# EAGLE board 16 ch sample-and-hold card (EAGLE 7.2.0)
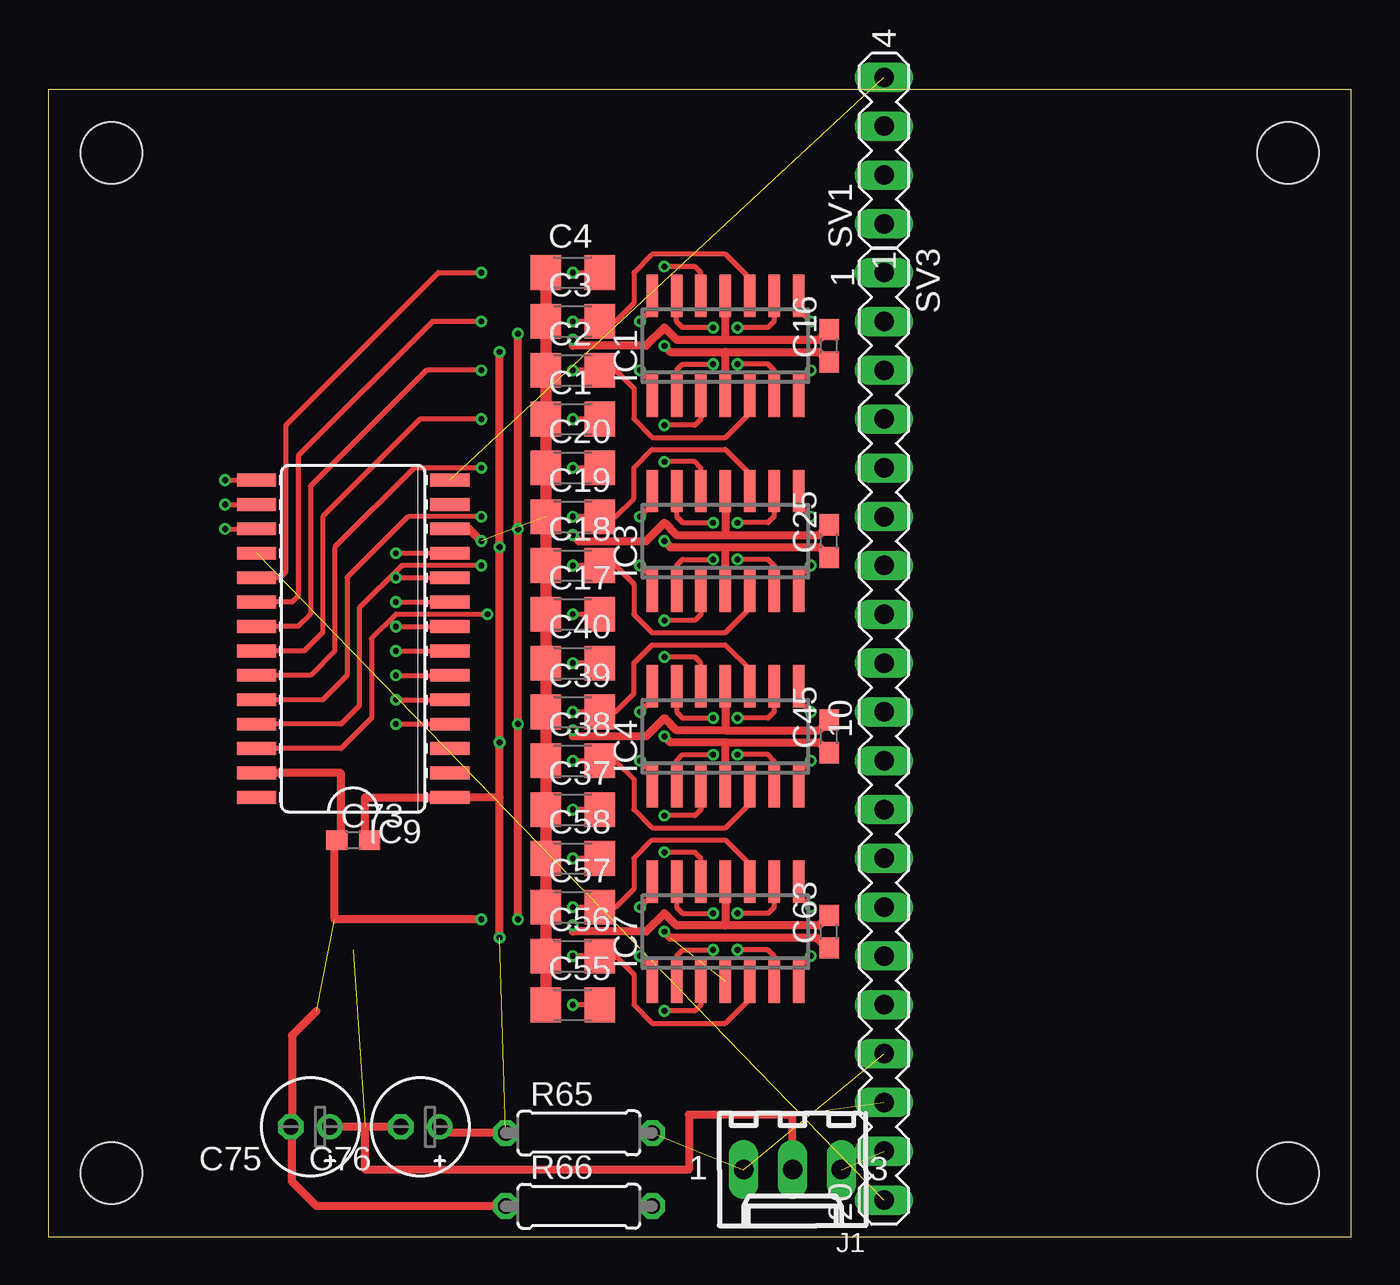
[diagram p0: board, top side]
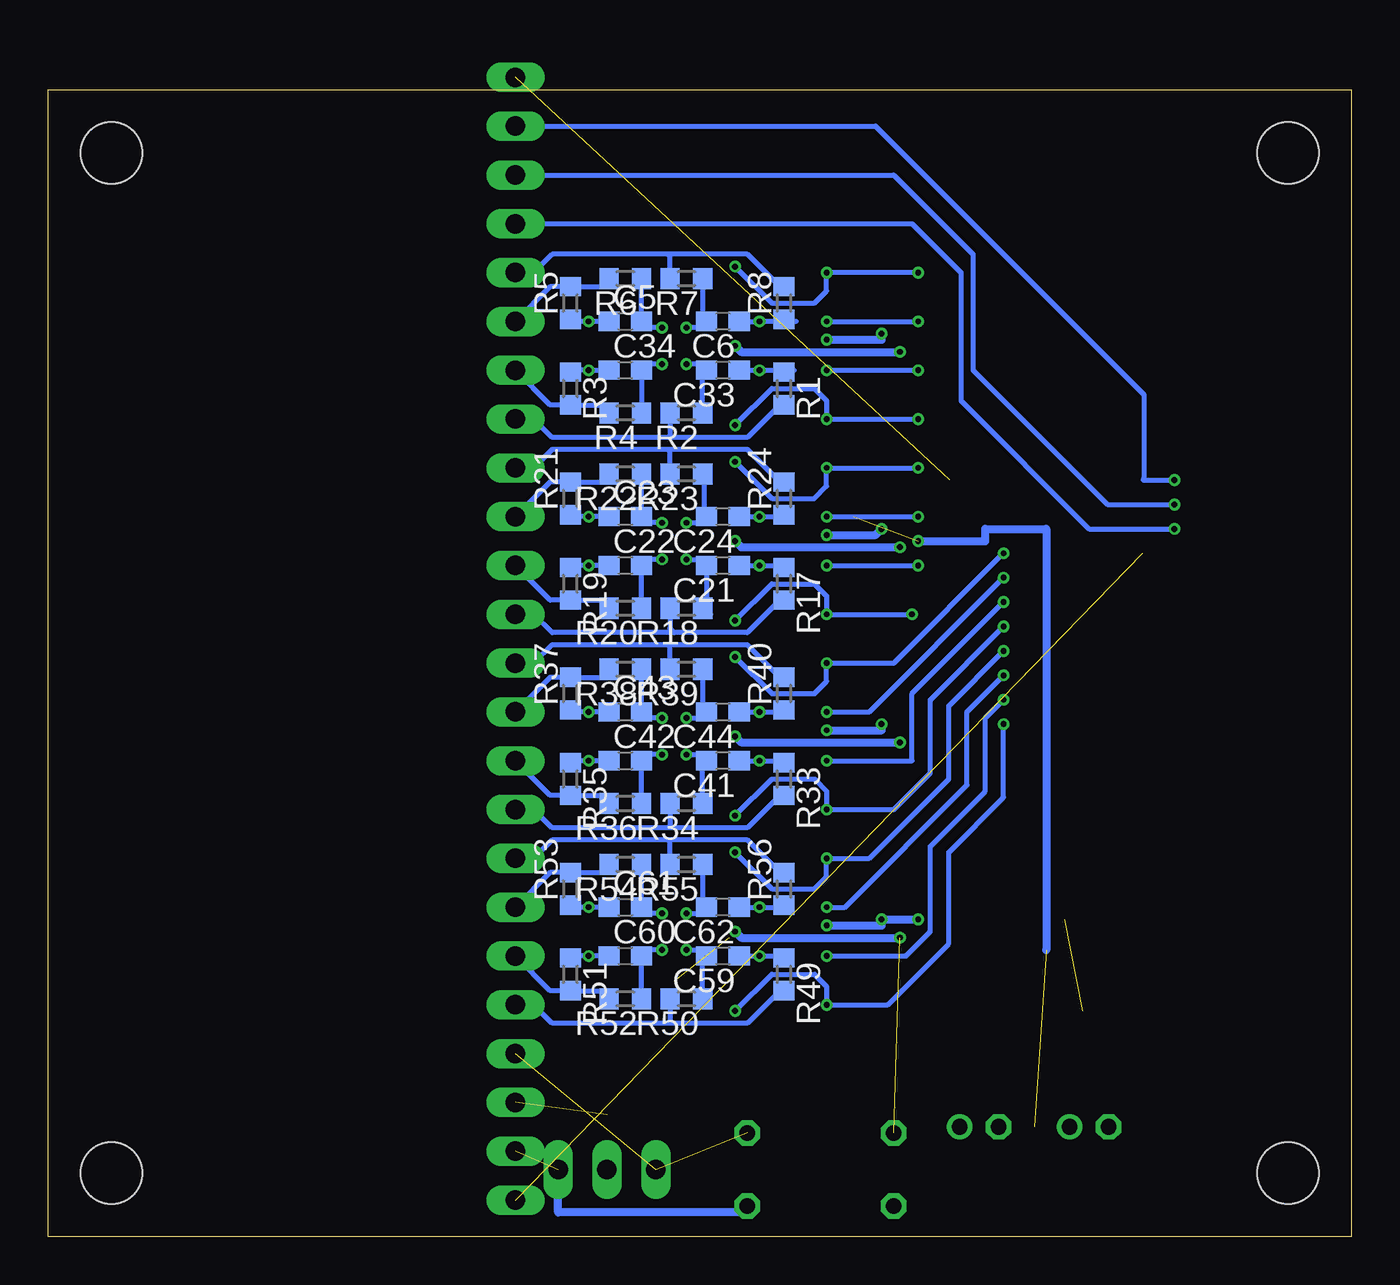
[diagram p1: board, bottom side, seen from below]

Size 67.82 x 59.69 mm. Coordinates in mm from the lower left corner, seen from the top.
Outline: 0,0 67.82,0 67.82,59.69 0,59.69 0,0
Copper layers (1*16): Top 0.035mm / dielectric 1.5mm / Bottom 0.035mm
Design rules "dirt_cheap_dirty_boards.v1": minimum track width 5mil, minimum drill 12mil, track to track 5mil, track to pad 5mil, pad to pad 5mil, via to via 5mil, smd to smd 0mil, copper to edge 10mil, drill to drill 10mil, minimum pad ring 10mil, minimum via ring 6mil, stop-mask expansion 2mil, vias tented up to drill 25mil, thermal gap 10mil
Holes 3.2 mm at 3.3,56.39 64.52,56.39 64.52,3.3 3.3,3.3

## Footprints (pad centres in the part's own frame; a part is rotated, then mirrored left to right if it is on the bottom)
C1206 = smd 1.6 x 1.8: 1 -1.4,0; 2 1.4,0
C0603 = smd 1.1 x 1: 1 -0.85,0; 2 0.85,0
E2-5 = drill 0.813 pad 1.27: + -1.016,0 | drill 0.813 pad 1.27 octagon: - 1.016,0
SO14 = smd 0.6 x 2.2: 1 -3.81,-2.6; 2 -2.54,-2.6; 3 -1.27,-2.6; 4 0,-2.6; 5 1.27,-2.6; 6 2.54,-2.6; 7 3.81,-2.6; 8 3.81,2.6; 9 2.54,2.6; 10 1.27,2.6; 11 0,2.6; 12 -1.27,2.6; 13 -2.54,2.6; 14 -3.81,2.6
SO28L = smd 0.66 x 2.032: 1 -8.255,-5.029; 2 -6.985,-5.029; 3 -5.715,-5.029; 4 -4.445,-5.029; 5 -3.175,-5.029; 6 -1.905,-5.029; 7 -0.635,-5.029; 8 0.635,-5.029; 9 1.905,-5.029; 10 3.175,-5.029; 11 4.445,-5.029; 12 5.715,-5.029; 13 6.985,-5.029; 14 8.255,-5.029; 15 8.255,5.029; 16 6.985,5.029; 17 5.715,5.029; 18 4.445,5.029; 19 3.175,5.029; 20 1.905,5.029; 21 0.635,5.029; 22 -0.635,5.029; 23 -1.905,5.029; 24 -3.175,5.029; 25 -4.445,5.029; 26 -5.715,5.029; 27 -6.985,5.029; 28 -8.255,5.029
6410-03 = drill 1.016 long: 1 2.54,0; 2 0,0; 3 -2.54,0
R0603 = smd 1 x 1.1: 1 -0.85,0; 2 0.85,0
0207/7 = drill 0.813 octagon: 1 -3.81,0; 2 3.81,0
MA04-1 = drill 1.016 long: 1 -3.81,0; 2 -1.27,0; 3 1.27,0; 4 3.81,0
MA20-1 = drill 1.016 long: 1 -24.13,0; 2 -21.59,0; 3 -19.05,0; 4 -16.51,0; 5 -13.97,0; 6 -11.43,0; 7 -8.89,0; 8 -6.35,0; 9 -3.81,0; 10 -1.27,0; 11 1.27,0; 12 3.81,0; 13 6.35,0; 14 8.89,0; 15 11.43,0; 16 13.97,0; 17 16.51,0; 18 19.05,0; 19 21.59,0; 20 24.13,0

## Placement (x,y rotation side)
C1  [C1206]  27.3,42.55 0 top
C2  [C1206]  27.3,45.09 0 top
C3  [C1206]  27.3,47.62 0 top
C4  [C1206]  27.3,50.16 0 top
C5  0.1uF  [C0603]  37.78,47.62 0 bottom
C6  0.1uF  [C0603]  32.7,47.62 180 bottom
C16  0.1uF  [C0603]  40.64,46.35 90 top
C17  [C1206]  27.3,32.38 0 top
C18  [C1206]  27.3,34.92 0 top
C19  [C1206]  27.3,37.47 0 top
C20  [C1206]  27.3,40.01 0 top
C21  0.1uF  [C0603]  32.7,34.92 180 bottom
C22  0.1uF  [C0603]  37.78,34.92 0 bottom
C23  0.1uF  [C0603]  37.78,37.47 0 bottom
C24  0.1uF  [C0603]  32.7,37.47 180 bottom
C25  0.1uF  [C0603]  40.64,36.2 90 top
C33  0.1uF  [C0603]  32.7,45.09 180 bottom
C34  0.1uF  [C0603]  37.78,45.09 0 bottom
C37  [C1206]  27.3,22.23 0 top
C38  [C1206]  27.3,24.77 0 top
C39  [C1206]  27.3,27.3 0 top
C40  [C1206]  27.3,29.84 0 top
C41  0.1uF  [C0603]  32.7,24.77 180 bottom
C42  0.1uF  [C0603]  37.78,24.77 0 bottom
C43  0.1uF  [C0603]  37.78,27.3 0 bottom
C44  0.1uF  [C0603]  32.7,27.3 180 bottom
C45  0.1uF  [C0603]  40.64,26.04 90 top
C55  [C1206]  27.3,12.06 0 top
C56  [C1206]  27.3,14.61 0 top
C57  [C1206]  27.3,17.14 0 top
C58  [C1206]  27.3,19.68 0 top
C59  0.1uF  [C0603]  32.7,14.61 180 bottom
C60  0.1uF  [C0603]  37.78,14.61 0 bottom
C61  0.1uF  [C0603]  37.78,17.14 0 bottom
C62  0.1uF  [C0603]  32.7,17.14 180 bottom
C63  0.1uF  [C0603]  40.64,15.88 90 top
C73  0.1uF  [C0603]  15.88,20.64 0 top
C75  22uF 25V  [E2-5]  13.65,5.71 180 top
C76  22uF 25V  [E2-5]  19.37,5.71 180 top
IC1  TL074D  [SO14]  35.24,46.35 0 top
IC3  TL074D  [SO14]  35.24,36.2 0 top
IC4  TL074D  [SO14]  35.24,26.04 0 top
IC7  TL074D  [SO14]  35.24,15.88 0 top
IC9  MAX306CWI  [SO28L]  15.88,31.11 90 top
J1  22-27-2031-03  [6410-03]  38.73,3.49 180 top
R1  100R  [R0603]  29.53,44.13 270 bottom
R2  1k  [R0603]  34.61,42.86 180 bottom
R3  100R  [R0603]  40.64,44.13 270 bottom
R4  1k  [R0603]  37.78,42.86 180 bottom
R5  100R  [R0603]  40.64,48.58 90 bottom
R6  1k  [R0603]  37.78,49.85 180 bottom
R7  1k  [R0603]  34.61,49.85 180 bottom
R8  100R  [R0603]  29.53,48.58 90 bottom
R17  100R  [R0603]  29.53,33.97 270 bottom
R18  1k  [R0603]  34.61,32.7 180 bottom
R19  100R  [R0603]  40.64,33.97 270 bottom
R20  1k  [R0603]  37.78,32.7 180 bottom
R21  100R  [R0603]  40.64,38.42 90 bottom
R22  1k  [R0603]  37.78,39.69 180 bottom
R23  1k  [R0603]  34.61,39.69 180 bottom
R24  100R  [R0603]  29.53,38.42 90 bottom
R33  100R  [R0603]  29.53,23.81 270 bottom
R34  1k  [R0603]  34.61,22.54 180 bottom
R35  100R  [R0603]  40.64,23.81 270 bottom
R36  1k  [R0603]  37.78,22.54 180 bottom
R37  100R  [R0603]  40.64,28.26 90 bottom
R38  1k  [R0603]  37.78,29.53 180 bottom
R39  1k  [R0603]  34.61,29.53 180 bottom
R40  100R  [R0603]  29.53,28.26 90 bottom
R49  100R  [R0603]  29.53,13.65 270 bottom
R50  1k  [R0603]  34.61,12.38 180 bottom
R51  100R  [R0603]  40.64,13.65 270 bottom
R52  1k  [R0603]  37.78,12.38 180 bottom
R53  100R  [R0603]  40.64,18.1 90 bottom
R54  1k  [R0603]  37.78,19.37 180 bottom
R55  1k  [R0603]  34.61,19.37 180 bottom
R56  100R  [R0603]  29.53,18.1 90 bottom
R65  100  [0207/7]  27.62,5.4 0 top
R66  100  [0207/7]  27.62,1.59 0 top
SV1  [MA04-1]  43.5,56.52 90 top
SV3  [MA20-1]  43.5,26.04 270 top

## Library data of the parts
C1-C6 C16-C25 C33 C34 C37-C45 C55-C63 C73 C75 C76 R1-R8 R17-R24 R33-R40 R49-R56 R65 R66 = resistor
IC1 IC3 IC4 IC7 = linear
IC9 = maxim; MF: MAXIM; MPN: MAX306CWI; OC_FARNELL: unknown; OC_NEWARK: 90C2555
J1 = con-molex; OC_FARNELL: unknown; OC_NEWARK: unknown
SV1 SV3 = con-lstb; OC_FARNELL: unknown; OC_NEWARK: unknown

## Nets
+15V: C16.1 C25.1 C45.1 C63.1 C73.2 C76.+ IC1.4 IC3.4 IC4.4 IC7.4 IC9.1 R65.1
-15V: C16.2 C25.2 C45.2 C63.2 C73.1 C75.- IC1.11 IC3.11 IC4.11 IC7.11 IC9.27 R66.1
A0: IC9.17 SV1.1
A1: IC9.16 SV1.2
A2: IC9.15 SV1.3
A3: IC9.14 SV1.4
AGND: C1.1 C2.1 C3.1 C4.1 C17.1 C18.1 C19.1 C20.1 C37.1 C38.1 C39.1 C40.1 C55.1 C56.1 C57.1 C58.1 C75.+ C76.- IC9.12 J1.2 SV3.18
DAC1: IC9.28
EN0: IC9.18 SV3.20
IN1: C4.2 IC1.12 IC9.19
IN3: C3.2 IC1.10 IC9.20
IN4: C2.2 IC1.5 IC9.21
IN6: C1.2 IC1.3 IC9.22
IN9: C20.2 IC3.12 IC9.23
IN11: C19.2 IC3.10 IC9.24
IN12: C18.2 IC3.5 IC9.25
IN14: C17.2 IC3.3 IC9.26
IN17: C40.2 IC4.12 IC9.11
IN19: C39.2 IC4.10 IC9.10
IN20: C38.2 IC4.5 IC9.9
IN22: C37.2 IC4.3 IC9.8
IN25: C58.2 IC7.12 IC9.7
IN27: C57.2 IC7.10 IC9.6
IN28: C56.2 IC7.5 IC9.5
IN30: C55.2 IC7.3 IC9.4
N$1: C33.2 IC1.2 R2.1
N$2: C33.1 IC1.1 R1.1
N$3: C34.1 IC1.7 R3.1
N$4: C5.1 IC1.8 R5.1
N$5: C34.2 IC1.6 R4.1
N$6: C6.1 IC1.14 R8.1
N$7: C5.2 IC1.9 R6.1
N$8: C6.2 IC1.13 R7.1
N$9: C21.1 IC3.1 R17.1
N$10: C21.2 IC3.2 R18.1
N$19: C22.1 IC3.7 R19.1
N$20: C22.2 IC3.6 R20.1
N$21: C23.1 IC3.8 R21.1
N$22: C24.1 IC3.14 R24.1
N$23: C23.2 IC3.9 R22.1
N$24: C24.2 IC3.13 R23.1
N$33: C41.1 IC4.1 R33.1
N$34: C41.2 IC4.2 R34.1
N$35: C42.1 IC4.7 R35.1
N$36: C42.2 IC4.6 R36.1
N$37: C43.1 IC4.8 R37.1
N$38: C44.1 IC4.14 R40.1
N$39: C43.2 IC4.9 R38.1
N$40: C44.2 IC4.13 R39.1
N$49: C59.1 IC7.1 R49.1
N$50: C59.2 IC7.2 R50.1
N$51: C60.1 IC7.7 R51.1
N$52: C60.2 IC7.6 R52.1
N$53: C61.1 IC7.8 R53.1
N$54: C62.1 IC7.14 R56.1
N$55: C61.2 IC7.9 R54.1
N$56: C62.2 IC7.13 R55.1
OUT0: R7.2 R8.2 SV3.1
OUT1: R5.2 R6.2 SV3.2
OUT6: R3.2 R4.2 SV3.3
OUT7: R1.2 R2.2 SV3.4
OUT8: R23.2 R24.2 SV3.5
OUT9: R21.2 R22.2 SV3.6
OUT14: R19.2 R20.2 SV3.7
OUT15: R17.2 R18.2 SV3.8
OUT16: R39.2 R40.2 SV3.9
OUT17: R37.2 R38.2 SV3.10
OUT22: R35.2 R36.2 SV3.11
OUT23: R33.2 R34.2 SV3.12
OUT24: R55.2 R56.2 SV3.13
OUT25: R53.2 R54.2 SV3.14
OUT30: R51.2 R52.2 SV3.15
OUT31: R49.2 R50.2 SV3.16
V+: J1.1 R65.2 SV3.17
V-: J1.3 R66.2 SV3.19

## Tracks (layer width: path | path; a pad name or v marks a point on that pad's centre or on a via)
+15V  (via drill 0.3)  (2 unrouted)
  Top 0.406: IC3.4 35.24,35.88 | v32.07,36.2 32.38,35.88 35.24,35.88 | v32.07,46.35 32.38,46.04 35.24,46.04 | 40.64,25.08 C45.1 40.11,25.72 35.24,25.72 | R65.1 20.7,5.4 C76.+ | 16.83,20.64 C73.2 16.51,20.64 16.51,22.86 IC9.1 23.5,22.86 | IC1.4 35.24,46.04 | 35.24,46.04 40.11,46.04 C16.1 | 35.24,35.88 40.11,35.88 C25.1 | IC4.4 35.24,25.72 | 35.24,25.72 32.38,25.72 v32.07,26.04 | 23.5,22.86 v23.5,25.72 v23.5,35.88 v23.5,46.04 | C63.1 40.54,15.03 40.01,15.56 32.38,15.56 v32.07,15.88 | v23.5,15.56 23.5,22.86
  Bottom 0.406: v32.07,36.2 31.75,35.88 v23.5,35.88 | v32.07,46.35 31.75,46.04 v23.5,46.04 | v32.07,26.04 31.75,25.72 v23.5,25.72 | v32.07,15.88 31.75,15.56 v23.5,15.56
-15V  (via drill 0.3)  (1 unrouted)
  Top 0.406: 35.24,36.51 32.7,36.51 32.07,37.15 31.11,36.2 27.62,36.2 v27.3,36.51 | IC3.11 35.24,36.51 | v27.3,46.67 27.3,46.35 31.11,46.35 32.07,47.31 32.7,46.67 35.24,46.67 | 35.24,16.19 40.11,16.19 C63.2 | 35.24,16.19 32.7,16.19 32.07,16.83 31.11,15.88 27.3,15.88 v27.3,16.19 | 13.97,11.75 12.7,10.48 12.7,5.78 | 12.7,5.78 C75.- | R66.1 13.97,1.59 12.7,2.86 12.7,5.78 | IC7.11 35.24,16.19 | C73.1 15.03,20.74 15.24,20.95 | 15.24,20.95 15.24,24.13 IC9.27 | C73.1 15.24,20.64 15.24,20.95 | 35.24,46.67 IC1.11 | 35.24,46.67 40.11,46.67 C16.2 | 35.24,36.51 40.11,36.51 C25.2 | 35.24,26.35 40.11,26.35 C45.2 | IC4.11 35.24,26.35 | 35.24,26.35 32.7,26.35 32.07,26.99 31.11,26.04 27.3,26.04 v27.3,26.35 | C73.1 14.92,20.54 14.92,16.51 v22.54,16.51 | v24.45,46.99 v24.45,36.83 v24.45,26.67 v24.45,16.51
  Bottom 0.406: v27.3,46.67 24.45,46.67 v24.45,46.99 | v27.3,26.35 24.45,26.35 v24.45,26.67 | v27.3,16.19 24.45,16.19 v24.45,16.51 v22.54,16.51 | v27.3,36.51 24.77,36.51 v24.45,36.83
A0  (via drill 0.3)
  Top 0.254: v9.21,36.83 IC9.17
  Bottom 0.254: SV1.1 22.86,52.7 20.32,50.16 20.32,43.5 13.65,36.83 v9.21,36.83
A1  (via drill 0.3)
  Top 0.254: v9.21,38.1 IC9.16
  Bottom 0.254: SV1.2 23.81,55.24 19.68,51.12 19.68,45.09 12.7,38.1 v9.21,38.1
A2  (via drill 0.3)
  Top 0.254: v9.21,39.37 IC9.15
  Bottom 0.254: SV1.3 24.77,57.78 10.79,43.81 10.79,39.42 IC9.15 v9.21,39.37
A3  (1 unrouted)
AGND  (via drill 0.3)  (3 unrouted)
  Top 0.254: 25.91,45.72 C2.1
  Top 0.406: C76.- 16.51,5.71 | 16.51,5.71 C75.+ | J1.2 38.73,6.35 33.34,6.35 33.34,3.49 16.51,3.49 16.51,5.71 | IC9.12 21.91,36.83 v22.54,36.2
  Top 0.61: C4.1 C3.1 C2.1 C1.1 C20.1 C19.1 C18.1 C17.1 C40.1 C39.1 C38.1 C37.1 C58.1 C57.1 C56.1 C55.1
  Bottom 0.406: v22.54,36.2 19.05,36.2 19.05,36.83 15.88,36.83 15.88,14.92
EN0  (1 unrouted)
IN1  (via drill 0.3)
  Top 0.254: IC9.19 12.06,34.29 12.38,34.61 12.38,42.23 20.32,50.16 v22.54,50.16 | v27.3,50.16 C4.2 | IC1.12 33.97,50.16 33.66,50.48 v32.07,50.48
  Bottom 0.254: v22.54,50.16 v27.3,50.16 27.3,49.21 27.94,48.58 30.16,48.58 v32.07,50.48
IN3  (via drill 0.3)
  Top 0.254: IC1.10 36.51,49.85 35.24,51.12 31.43,51.12 30.48,50.16 30.48,48.58 29.53,47.62 C3.2 v27.3,47.62 | v22.54,47.62 20,47.62 13.02,40.64 13.02,33.34 12.7,33.02 IC9.20
  Bottom 0.254: v27.3,47.62 v22.54,47.62
IN4  (via drill 0.3)
  Top 0.254: v27.3,45.09 C2.2 29.53,45.09 30.48,44.13 30.48,42.55 31.43,41.59 35.24,41.59 36.51,42.86 IC1.5 | v22.54,45.09 19.68,45.09 13.65,39.05 13.65,32.38 13.02,31.75 IC9.21
  Bottom 0.254: v27.3,45.09 v22.54,45.09
IN6  (via drill 0.3)
  Top 0.254: C1.2 v27.3,42.55 | v22.54,42.55 19.37,42.55 14.29,37.47 14.29,31.43 13.34,30.48 IC9.22 | IC1.3 33.97,42.55 33.66,42.23 v32.07,42.23
  Bottom 0.254: v22.54,42.55 v27.3,42.55 27.3,43.5 27.94,44.13 30.16,44.13 v32.07,42.23
IN9  (via drill 0.3)
  Top 0.254: C20.2 v27.3,40.01 | v22.54,40.01 19.05,40.01 14.92,35.88 14.92,30.48 13.65,29.21 IC9.23 | IC3.12 33.97,40.01 33.66,40.32 v32.07,40.32
  Bottom 0.254: v22.54,40.01 v27.3,40.01 27.3,39.05 27.94,38.42 30.16,38.42 v32.07,40.32
IN11  (via drill 0.3)
  Top 0.254: IC3.10 36.51,39.69 35.24,40.96 31.43,40.96 30.48,40.01 30.48,38.42 29.53,37.47 C19.2 v27.3,37.47 | v22.54,37.47 18.73,37.47 15.56,34.29 15.56,29.21 14.29,27.94 IC9.24
  Bottom 0.254: v27.3,37.47 v22.54,37.47
IN12  (via drill 0.3)
  Top 0.254: IC3.5 36.51,32.7 35.24,31.43 31.43,31.43 30.48,32.38 30.48,33.97 29.53,34.92 C18.2 v27.3,34.92 | v22.54,34.92 18.41,34.92 16.19,32.7 16.19,27.62 15.24,26.67 IC9.25
  Bottom 0.254: v27.3,34.92 v22.54,34.92
IN14  (via drill 0.3)
  Top 0.254: C17.2 v27.3,32.38 | v22.86,32.38 18.1,32.38 16.83,31.11 16.83,26.99 15.24,25.4 IC9.26 | IC3.3 33.97,32.38 33.66,32.07 v32.07,32.07
  Bottom 0.254: v22.86,32.38 v27.3,32.38 27.3,33.34 27.94,33.97 30.16,33.97 v32.07,32.07
IN17  (via drill 0.3)
  Top 0.254: C40.2 v27.3,29.84 | v18.1,35.56 IC9.11 | IC4.12 33.97,29.84 33.66,30.16 v32.07,30.16
  Bottom 0.254: v18.1,35.56 23.81,29.84 v27.3,29.84 27.3,28.89 27.94,28.26 30.16,28.26 v32.07,30.16
IN19  (via drill 0.3)
  Top 0.254: IC4.10 36.51,29.53 35.24,30.8 31.43,30.8 30.48,29.84 30.48,28.26 29.53,27.3 C39.2 v27.3,27.3 | v18.1,34.29 IC9.10
  Bottom 0.254: v27.3,27.3 25.08,27.3 v18.1,34.29
IN20  (via drill 0.3)
  Top 0.254: IC4.5 36.51,22.54 35.24,21.27 31.43,21.27 30.48,22.23 30.48,23.81 29.53,24.77 C38.2 v27.3,24.77 | v18.1,33.02 IC9.9
  Bottom 0.254: v27.3,24.77 22.86,24.77 22.86,28.26 v18.1,33.02
IN22  (via drill 0.3)
  Top 0.254: C37.2 v27.3,22.23 | v18.1,31.75 IC9.8 | IC4.3 33.97,22.23 33.66,21.91 v32.07,21.91
  Bottom 0.254: v18.1,31.75 21.91,27.94 21.91,24.13 23.81,22.23 v27.3,22.23 27.3,23.18 27.94,23.81 30.16,23.81 v32.07,21.91
IN25  (via drill 0.3)
  Top 0.254: C58.2 v27.3,19.68 | v18.1,30.48 IC9.7 | IC7.12 33.97,19.68 33.66,20 v32.07,20
  Bottom 0.254: v18.1,30.48 20.95,27.62 20.95,23.81 25.08,19.68 v27.3,19.68 27.3,18.73 27.94,18.1 30.16,18.1 v32.07,20
IN27  (via drill 0.3)
  Top 0.254: IC7.10 36.51,19.37 35.24,20.64 31.43,20.64 30.48,19.68 30.48,18.1 29.53,17.14 C57.2 v27.3,17.14 | v18.1,29.21 IC9.6
  Bottom 0.254: v27.3,17.14 26.35,17.14 20,23.5 20,27.3 v18.1,29.21
IN28  (via drill 0.3)
  Top 0.254: IC7.5 36.51,12.38 35.24,11.11 31.43,11.11 30.48,12.06 30.48,13.65 29.53,14.61 C56.2 v27.3,14.61 | v18.1,27.94 IC9.5
  Bottom 0.254: v27.3,14.61 23.18,14.61 21.91,15.88 21.91,20.32 19.05,23.18 19.05,26.99 v18.1,27.94
IN30  (via drill 0.3)
  Top 0.254: C55.2 v27.3,12.06 | v18.1,26.67 IC9.4 | IC7.3 33.97,12.06 33.66,11.75 v32.07,11.75
  Bottom 0.254: v18.1,26.67 18.1,22.86 20.95,20 20.95,15.24 24.13,12.06 v27.3,12.06 27.3,13.02 27.94,13.65 30.16,13.65 v32.07,11.75
N$1  (via drill 0.3)
  Top 0.254: IC1.2 32.7,45.09 33.02,45.4 v34.61,45.4
  Bottom 0.254: v34.61,45.4 33.66,45.4 33.55,45.3 C33.2 33.76,44.88 R2.1
N$2  (via drill 0.3)
  Top 0.254: IC1.1 31.43,44.45 v30.8,45.09
  Bottom 0.254: C33.1 v30.8,45.09 29,45.09 R1.1
N$3  (via drill 0.3)
  Top 0.254: IC1.7 39.05,44.45 v39.69,45.09
  Bottom 0.254: R3.1 40.54,45.09 v39.69,45.09 C34.1
N$4  (via drill 0.3)
  Top 0.254: IC1.8 39.05,48.26 v39.69,47.62
  Bottom 0.254: 41.06,47.73 R5.1 40.85,47.62 v39.69,47.62 C5.1
N$5  (via drill 0.3)
  Top 0.254: IC1.6 37.78,45.09 37.47,45.4 v35.88,45.4
  Bottom 0.254: R4.1 C34.2 36.62,45.4 v35.88,45.4
N$6  (via drill 0.3)
  Top 0.254: v30.8,47.62 31.43,48.26 IC1.14
  Bottom 0.254: C6.1 v30.8,47.62 28.89,47.62 R8.1
N$7  (via drill 0.3)
  Top 0.254: IC1.9 37.78,47.62 37.47,47.31 v35.88,47.31
  Bottom 0.254: R6.1 C5.2 37.25,47.31 v35.88,47.31
N$8  (via drill 0.3)
  Top 0.254: v34.61,47.31 33.02,47.31 32.7,47.62 IC1.13
  Bottom 0.254: C6.2 33.66,47.31 | 33.66,47.31 v34.61,47.31 | R7.1 33.76,47.41 33.66,47.31
N$9  (via drill 0.3)
  Top 0.254: IC3.1 31.43,34.29 v30.8,34.92
  Bottom 0.254: R17.1 29.63,34.92 v30.8,34.92 C21.1
N$10  (via drill 0.3)
  Top 0.254: IC3.2 32.7,34.92 33.02,35.24 v34.61,35.24
  Bottom 0.254: R18.1 33.44,32.38 33.34,32.38 33.55,32.6 C21.2 33.87,35.24 v34.61,35.24
N$19  (via drill 0.3)
  Top 0.254: IC3.7 39.05,34.29 v39.69,34.92
  Bottom 0.254: R19.1 40.54,34.92 v39.69,34.92 C22.1
N$20  (via drill 0.3)
  Top 0.254: IC3.6 37.78,34.92 37.47,35.24 v35.88,35.24
  Bottom 0.254: v35.88,35.24 36.62,35.24 C22.2 R20.1
N$21  (via drill 0.3)
  Top 0.254: IC3.8 39.05,38.1 v39.69,37.47
  Bottom 0.254: R21.1 40.54,37.47 v39.69,37.47 C23.1
N$22  (via drill 0.3)
  Top 0.254: IC3.14 31.43,38.1 v30.8,37.47
  Bottom 0.254: R24.1 29.63,37.47 v30.8,37.47 C24.1
N$23  (via drill 0.3)
  Top 0.254: IC3.9 37.78,37.47 37.47,37.15 v35.88,37.15
  Bottom 0.254: v35.88,37.15 36.62,37.15 C23.2 R22.1
N$24  (via drill 0.3)
  Top 0.254: IC3.13 32.7,37.47 33.02,37.15 v34.61,37.15
  Bottom 0.254: v34.61,37.15 33.87,37.15 C24.2 33.55,37.68 33.66,37.78 33.66,39.27 R23.1
N$33  (via drill 0.3)
  Top 0.254: IC4.1 31.43,24.13 v30.8,24.77
  Bottom 0.254: R33.1 29.63,24.77 v30.8,24.77 C41.1
N$34  (via drill 0.3)
  Top 0.254: IC4.2 32.7,24.77 33.02,25.08 v34.61,25.08
  Bottom 0.254: v34.61,25.08 33.87,25.08 C41.2 33.76,24.56 R34.1
N$35  (via drill 0.3)
  Top 0.254: IC4.7 39.05,24.13 v39.69,24.77
  Bottom 0.254: R35.1 40.54,24.77 v39.69,24.77 C42.1
N$36  (via drill 0.3)
  Top 0.254: IC4.6 37.78,24.77 37.47,25.08 v35.88,25.08
  Bottom 0.254: v35.88,25.08 36.62,25.08 C42.2 R36.1
N$37  (via drill 0.3)
  Top 0.254: IC4.8 39.05,27.94 v39.69,27.3
  Bottom 0.254: R37.1 40.54,27.3 v39.69,27.3 C43.1
N$38  (via drill 0.3)
  Top 0.254: IC4.14 31.43,27.94 v30.8,27.3
  Bottom 0.254: R40.1 29.63,27.3 v30.8,27.3 C44.1
N$39  (via drill 0.3)
  Top 0.254: IC4.9 37.78,27.3 37.47,26.99 v35.88,26.99
  Bottom 0.254: v35.88,26.99 36.62,26.99 C43.2 R38.1
N$40  (via drill 0.3)
  Top 0.254: IC4.13 32.7,27.3 33.02,26.99 v34.61,26.99
  Bottom 0.254: v34.61,26.99 33.87,26.99 C44.2 33.76,27.51 R39.1
N$49  (via drill 0.3)
  Top 0.254: IC7.1 31.43,13.97 v30.8,14.61
  Bottom 0.254: R49.1 29.63,14.61 v30.8,14.61 C59.1
N$50  (via drill 0.3)
  Top 0.254: IC7.2 32.7,14.61 33.02,14.92 v34.61,14.92
  Bottom 0.254: v34.61,14.92 33.87,14.92 C59.2 33.76,14.4 R50.1
N$51  (via drill 0.3)
  Top 0.254: IC7.7 39.05,13.97 v39.69,14.61
  Bottom 0.254: R51.1 40.54,14.61 v39.69,14.61 C60.1
N$52  (via drill 0.3)
  Top 0.254: IC7.6 37.78,14.61 37.47,14.92 v35.88,14.92
  Bottom 0.254: R52.1 C60.2 36.62,14.92 v35.88,14.92
N$53  (via drill 0.3)
  Top 0.254: IC7.8 39.05,17.78 v39.69,17.14
  Bottom 0.254: R53.1 40.54,17.14 v39.69,17.14 C61.1
N$54  (via drill 0.3)
  Top 0.254: IC7.14 31.43,17.78 v30.8,17.14
  Bottom 0.254: R56.1 29.63,17.14 v30.8,17.14 C62.1
N$55  (via drill 0.3)
  Top 0.254: IC7.9 37.78,17.14 37.47,16.83 v35.88,16.83
  Bottom 0.254: v35.88,16.83 36.62,16.83 C61.2 R54.1
N$56  (via drill 0.3)
  Top 0.254: IC7.13 32.7,17.14 33.02,16.83 v34.61,16.83
  Bottom 0.254: v34.61,16.83 33.87,16.83 C62.2 33.76,17.35 R55.1
OUT0
  Bottom 0.254: R8.2 29.74,49.43 31.43,51.12 35.56,51.12 | 35.56,51.12 41.59,51.12 42.55,50.16 SV3.1 | R7.2 35.46,51.02 35.56,51.12
OUT1
  Bottom 0.254: R6.2 39.05,49.43 R5.2 41.7,49.43 SV3.2
OUT6
  Bottom 0.254: R3.2 39.05,43.28 R4.2 | R3.2 40.64,43.18 | R3.2 41.7,43.28 SV3.3
OUT7
  Bottom 0.254: 29.53,43.18 R1.2 29.74,43.28 31.43,41.59 35.56,41.59 | 35.56,41.59 41.59,41.59 42.55,42.55 SV3.4 | R2.2 35.46,41.7 35.56,41.59
OUT8
  Bottom 0.254: R24.2 29.74,39.27 31.43,40.96 35.56,40.96 | 35.56,40.96 41.59,40.96 42.55,40.01 SV3.5 | R23.2 35.46,40.85 35.56,40.96
OUT9
  Bottom 0.254: R22.2 39.05,39.27 R21.2 41.7,39.27 SV3.6
OUT14
  Bottom 0.254: R20.2 39.05,33.12 R19.2 41.7,33.12 SV3.7
OUT15
  Bottom 0.254: R17.2 29.74,33.12 31.43,31.43 35.24,31.43 | 35.24,31.43 41.59,31.43 42.55,32.38 SV3.8 | R18.2 35.46,31.65 35.24,31.43
OUT16
  Bottom 0.254: R40.2 29.74,29.11 31.43,30.8 35.56,30.8 | 35.56,30.8 41.59,30.8 42.55,29.84 SV3.9 | R39.2 35.46,30.7 35.56,30.8
OUT17
  Bottom 0.254: R38.2 39.05,29.11 R37.2 41.7,29.11 SV3.10
OUT22
  Bottom 0.254: R36.2 39.05,22.96 R35.2 41.7,22.96 SV3.11
OUT23
  Bottom 0.254: R33.2 29.74,22.96 31.43,21.27 35.56,21.27 | 35.56,21.27 41.59,21.27 42.55,22.23 SV3.12 | R34.2 35.46,21.38 35.56,21.27
OUT24
  Bottom 0.254: R56.2 29.74,18.95 31.43,20.64 35.56,20.64 | 35.56,20.64 41.59,20.64 42.55,19.68 SV3.13 | R55.2 35.46,20.54 35.56,20.64
OUT25
  Bottom 0.254: R54.2 39.05,18.95 R53.2 41.7,18.95 SV3.14
OUT30
  Bottom 0.254: R52.2 39.05,12.8 R51.2 41.7,12.8 SV3.15
OUT31
  Bottom 0.254: R49.2 29.74,12.8 31.43,11.11 35.56,11.11 | 35.56,11.11 41.59,11.11 42.55,12.06 SV3.16 | R50.2 35.46,11.21 35.56,11.11
V+  (2 unrouted)
V-  (1 unrouted)
  Bottom 0.406: R66.2 31.75,1.27 41.27,1.27 J1.3